# Altium PCB DAU_Kupplung_1_phasig_V1_16.PcbDoc
Units mm, origin at the board's own origin, x right, y up, seen from the top; angles counter-clockwise.
Board outline 142.88 x 57.48 mm, 2 copper layers (Top, Bottom), stack 1.57 mm thick; 57 components, 37 nets, 239 pads, 12 vias.
Unrouted connection lines stored in the file: 1.
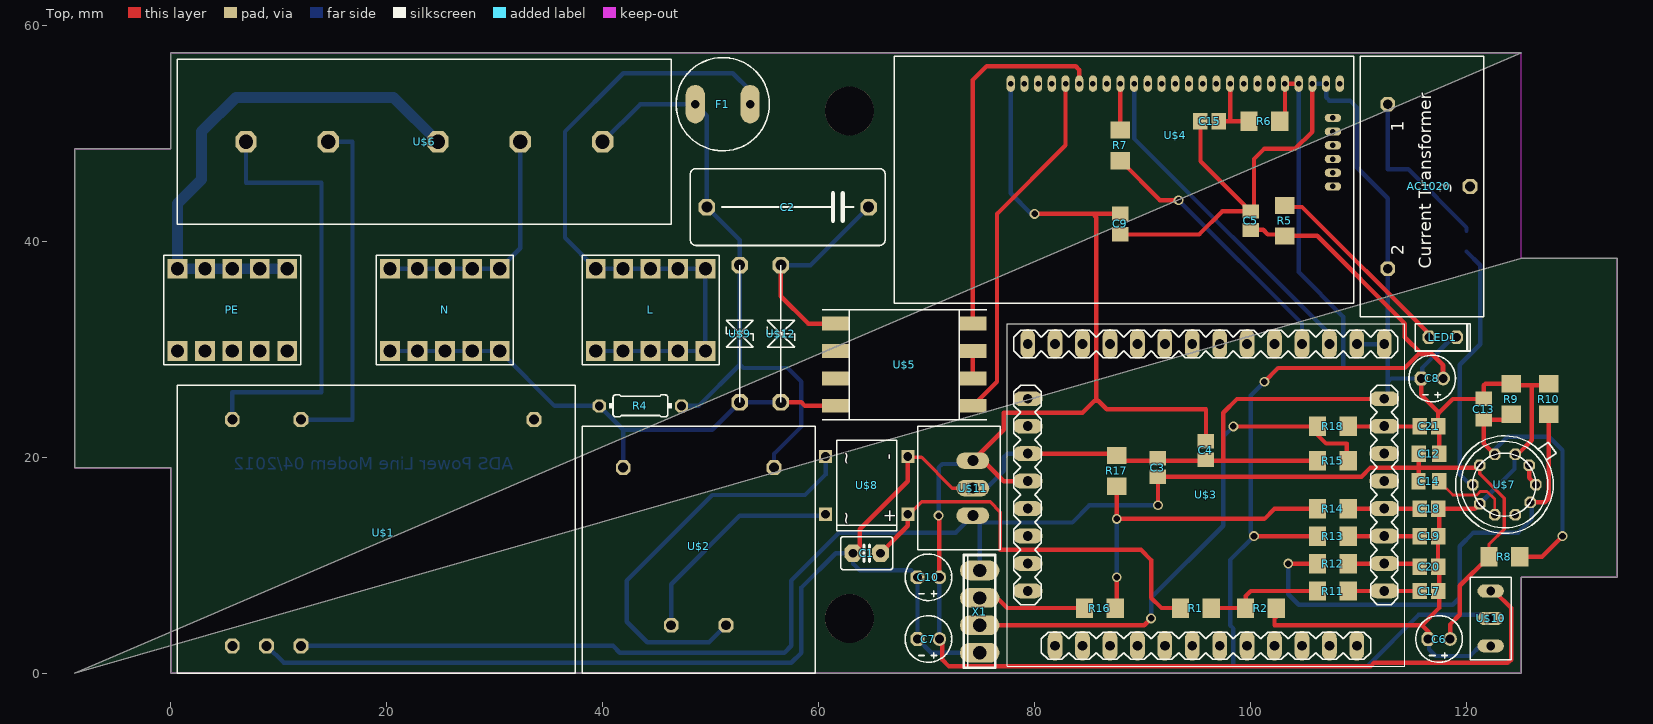
[diagram p0: Top view]
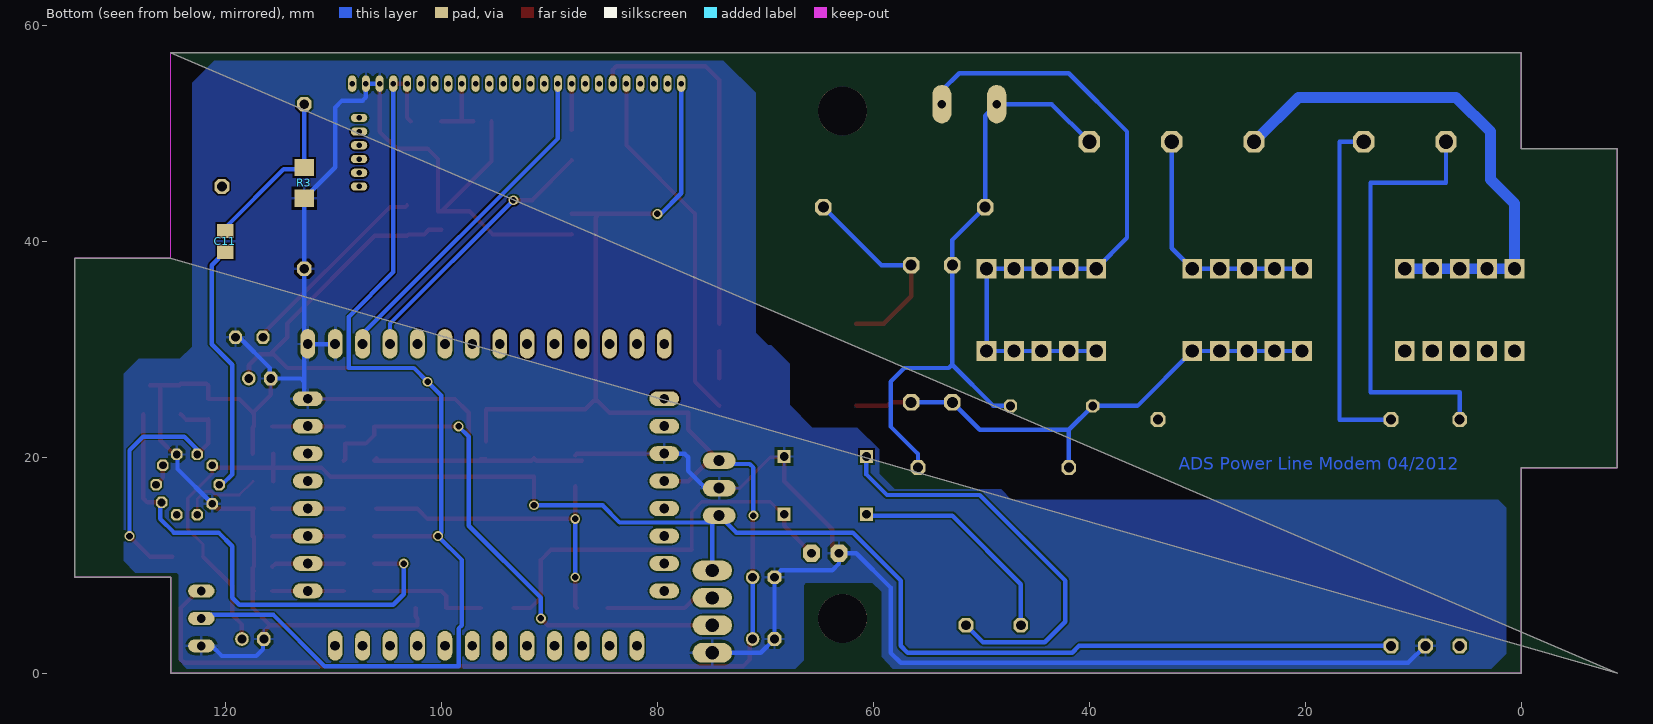
[diagram p1: Bottom view, seen from below]

## Layer stack, top to bottom
Top Solder: solder mask 0.0102, Solder Resist, Dk 3.5
Top: signal copper 0.035
Dielectric 1: core 1.5, FR-4, Dk 4.8
Bottom: signal copper 0.035
Bottom Solder: solder mask 0.0102, Solder Resist, Dk 3.5

## Board outline
125.095,57.48 0,57.48 0,48.59 -8.89,48.59 -8.89,19.05 0,19.05 0,0 125.095,0 125.095,8.89 133.985,8.89 133.985,38.43 125.095,38.43 -8.89,0

## Design rules (kind name [scope] priority, off if disabled: settings)
Clearance mdViaVia [IsVia vs IsVia] p1: gap=0.15
Clearance mdPadVia [IsPad vs IsVia] p2: gap=0.15
Clearance mdPadPad [IsPad vs IsPad] p3: gap=0.15
Clearance mdWireVia [(InLayerClass('Signal Layers') AND IsTrack) vs IsVia] p4: gap=0.15
Clearance mdWirePad [(InLayerClass('Signal Layers') AND IsTrack) vs IsPad] p5: gap=0.15
Clearance mdWireWire [(InLayerClass('Signal Layers') AND IsTrack) vs (InLayerClass('Signal Layers') AND IsTrack)] p6: gap=0.15
Clearance [All] p7: gap=0.15
HoleSize [All] p1: absolutevalues=TRUE maxlimit=2540 minlimit=0.3 maxpercent=80.000 minpercent=20.000
HoleToHoleClearance [All] p1: gap=0.2 allowstackedmicrovias=TRUE
PolygonConnect ThermalVias [IsVia] p1: connectstyle=Direct reliefconductorwidth=0.254 reliefentries=4 polygonreliefangle="90 Angle" airgapwidth=0.254
PolygonConnect [All] p2: connectstyle=Relief reliefconductorwidth=0.254 reliefentries=4 polygonreliefangle="90 Angle" airgapwidth=0.254
RoutingVias [All] p1: holewidth=0.711 width=1.27 viastyle="Through Hole" minholewidth=0.711 minwidth=1.27 maxholewidth=0.711 maxwidth=1.27
SilkToSilkClearance [All] p1 off: silktosilkclearance=0.254
SilkToSolderMaskClearance [IsPad] p1 off: minsilkscreentomaskgap=0.254 clearancetoexposedcopper=TRUE
SolderMaskExpansion [All] p1: expansion=0.075
UnpouredPolygon [All] p1: allowunpoured=FALSE
Width [All] p1: maxlimit=2540 minlimit=0.15 preferedwidth=0.254
25 further rules are at their usual default settings.

## Components (designator, comment, footprint, x,y, rotation, side; value= is the part's Value field where it differs from the comment)
AC1020 "" AC1010 121.615,32.385 r90 top
C1 "1µ" C2.5-3 64.465,11.125 r0 top
C2 "470n/250V" C150-072X183 57.15,43.18 r180 top
C3 "100n" C0805#1 91.44,19.05 r90 top
C4 "100n" C0805#1 95.885,20.65 r270 top
C5 "100n" C0805#1 100.025,41.91 r90 top
C6 "4µ7" E2-4 117.475,3.175 r180 top
C7 "4µ7" E2-4 70.18,3.175 r180 top
C8 "4µ7" E2-4 116.84,27.305 r180 top
C9 "100n" C0805#2 87.96,41.605 r90 top
C10 "4µ7" E2-4 70.18,8.89 r180 top
C11 "1µ" C0805#2 120.015,40.005 r270 bottom
C12 "0,1µ" C0805#2 116.535,20.32 r0 top
C13 "0,1µ" C0805#2 121.615,24.46 r90 top
C14 "4µ7" C0805#2 116.535,17.78 r180 top
C15 "1µ" C0805#1 96.215,51.13 r0 top
C17 "0,1µ" C0805#1 116.535,7.62 r0 top
C18 "0,1µ" C0805#1 116.535,15.24 r0 top
C19 "0,1µ" C0805#1 116.535,12.7 r0 top
C20 "0,1µ" C0805#1 116.535,9.855 r0 top
C21 "0,1µ" C0805#1 116.535,22.86 r0 top
F1 "T250V/250mA" TR5 51.13,52.705 r180 top
L "" FASTON_DOUBLE 44.45,33.655 r0 top
LED1 "" LED2X5 117.805,31.115 r0 top
N "" FASTON_DOUBLE 25.4,33.655 r0 top
PE "" FASTON_DOUBLE 5.715,33.655 r0 top
R1 "82k" R1206 94.945,6.045 r180 top
R2 "33k" R1206 100.965,6.045 r180 top
R3 "220R" R1206 112.725,45.415 r270 bottom
R4 "470k" 0204/7 43.51,24.765 r0 top
R5 "330R" R1206 103.2,41.91 r90 top
R6 "1M" R1206 101.295,51.13 r180 top
R7 "330R" R1206 87.96,48.895 r90 top
R8 "22k" R1206 123.52,10.795 r180 top
R9 "10k" R1206 124.155,25.4 r270 top
R10 "4k7" R1206 127.635,25.4 r90 top
R11 "10R" R1206 107.645,7.62 r0 top
R12 "10R" R1206 107.645,10.16 r0 top
R13 "10R" R1206 107.645,12.7 r0 top
R14 "10R" R1206 107.645,15.24 r0 top
R15 "220R" R1206 107.645,19.685 r0 top
R16 "680k" R1206 86.055,6.045 r180 top
R17 "470k" R1206 87.63,18.745 r270 top
R18 "10R" R1206 107.645,22.86 r0 top
U$1 "" RAC04_12SA 37.465,26.67 r180 top
U$2 "" TRAFO_0,35VA 38.1,22.86 r270 top
U$3 "" ADUC_MINIMUM 95.885,16.84 r90 top
U$4 "" IT800 109.55,57.15 r180 top
U$5 "" PLC-UEBERTRAGER_V2 67.945,28.575 r0 top
U$6 "" NETZFILTER 46.355,56.845 r180 top
U$7 "" TO100_10PIN 123.52,17.475 r90 top
U$8 "" RECTIFIER 60.655,21.59 r270 top
U$9 "" TSV 52.705,32.715 r270 top
U$10 "" TS1084_HOCH 122.25,2.54 r90 top
U$11 "" RECOM785X 76.835,17.145 r90 top
U$12 "" TSV 56.515,32.715 r270 top
X1 "" 4POL254 74.93,5.715 r90 top

## Footprints (in the part's own frame and the unit in brackets; to place one, negate y for a bottom-side part, rotate by r counter-clockwise, add the part's x,y. Pads: shape width x height; smd on the part's side, far side on the other; paste and mask are expansions set on the pad)
4POL254 [mil] "4POL254"
  oval 72x144 hole 48: 1(-150,0) 2(-50,0) 3(50,0) 4(150,0)
  silkscreen extent -205,-57 206,58
0204/7 [mil] "0204/7"
  oct 48x48 hole 32: 1(-150,0) 2(150,0)
  silkscreen extent -115,-40 115,40
AC1010 [mil] "AC1010"
  oct 54x54 hole 36: P$1(800,350) P$2(200,350) P$3(500,50)
  silkscreen extent 25,0 975,450
ADUC_MINIMUM [mil] "ADUC_MINIMUM"
  oval 54x108 hole 36: ADC0(-362.5,-650) ADC1(-262.5,-650) ADC2(-162.5,-650) ADC3(-62.5,-650) ADC4(238,-650) ADC5(338,-650) DAC0(38,-650) DAC1(138,-650) GND(138,650) GND2(-162.5,650) GND3(-262.5,650) P22(338,650) P23(238,650) P24(-362.5,650) VCC(38,650) VCC1(-62.5,650)
  oval 108x54 hole 36: ADC6(538,-650) ADC7(538,-550) ALE(-562.5,250) INT0(538,-250) MISO(538,-150) MOSI(538,450) P00(-562.5,150) P01(-562.5,50) P02(-562.5,-50) P03(-562.5,-150) P04(-562.5,-250) P05(-562.5,-350) P06(-562.5,-450) P07(-562.5,-550) P20(538,550) P21(538,650) P25(-562.5,550) P34(538,-50) P35(538,50) P36(538,150) P37(538,250) PWM0(-562.5,450) PWM1(-562.5,350) RXD(538,-450) SCLOCK(538,350) TXD(538,-350)
  silkscreen extent -638,-725 612,725
C2.5-3 [mil] "C2.5-3"
  oct 63x63 hole 32: 1(-50,0) 2(50,0)
  silkscreen extent -95,-60 95,60
C150-072X183 [mil] "C150-072X183"
  oct 60x60 hole 40: 1(-295,0) 2(295,0)
  silkscreen extent -355,-140 355,140
C0805#1 [mil] "C0805"
  rect 52x60 smd: 1(-33.46,0) 2(34,0)
C0805#2 [mil] "C0805"
  rect 52x60 smd: 1(-37.4,0) 2(38,0)
E2-4 [mil] "E2-4"
  round 50 hole 32: +(-40,0)
  oct 50x50 hole 32: -(40,0)
  silkscreen extent -85,-85 85,85
FASTON_DOUBLE [mil] "FASTON_DOUBLE"
  rect 72x72 hole 48: P$1(-200,-150) P$2(-100,-150) P$3(-200,150) P$4(-100,150) P$5(0,150) P$6(100,150) P$7(200,150) P$8(0,-150) P$9(100,-150) P$10(200,-150)
  silkscreen extent -250,-200 250,200
IT800 [mil] "IT800"
  oval 30x60 hole 20: 2AGND(100,100) 3GND(150,100) 4_33VAN(200,100) 5_33V(250,100) 5V(1250,100) LINE1(1000,100) LINE2(1050,100) P$1(50,100) P$6(300,100) P$7(350,100) P$8(400,100) P$10(500,100) P$11(550,100) P$12(600,100) P$13(650,100) P$14(700,100) P$15(750,100) P$16(800,100) P$17(850,100) P$18(900,100) P$19(950,100) P$22(1100,100) P$23(1150,100) P$24(1200,100) RESET(450,100)
  oval 60x30 hole 20: P$26(75,225) P$27(75,275) P$28(75,325) P$29(75,375) P$30(75,425) P$31(75,475)
  silkscreen extent 0,0 1675,900
LED2X5 [mil] "LED2X5"
  oct 48x48 hole 32: A(-50,0) K(50,0)
  silkscreen extent -100,-50 100,50
NETZFILTER [mil] "NETZFILTER"
  oct 78x78 hole 52: L(250,300) L'(1550,300) N(550,300) N'(1250,300) PE(850,300)
  silkscreen extent 0,0 1800,600
PLC-UEBERTRAGER_V2 [mm] "PLC-UEBERTRAGER_V2"
  rect 2.54x1.27 smd: 1LINE1(6.35,3.81) 2(6.35,1.27) 3(6.35,-1.27) 4LINE2(6.35,-3.81) 6NC(-6.35,1.27) 7NC(-6.35,-1.27) 8N(-6.35,-3.81) L5(-6.35,3.81)
  silkscreen extent -7.62,-5.08 7.62,5.08
R1206 [mil] "R1206"
  rect 63x71 smd: 1(-55.98,0) 2(56,0)
RAC04_12SA [mil] "RAC04_12SA"
  oct 54x54 hole 36: +VO(1000,950) GND(1125,950) L(1250,125) N(1000,125) NC(150,125) NC1(1250,950)
  silkscreen extent 0,0 1450,1050
RECOM785X [mil] "RECOM785X"
  oval 60x120 hole 40: GND(0,100) VIN(-100,100) VOUT(100,100)
  silkscreen extent -225,0 225,300
RECTIFIER [mil] "RECTIFIER"
  rect 48x48 hole 32: +(270,300) -(60,300) ~1(60,0) ~2(270,0)
  silkscreen extent 0,40 330,260
TO100_10PIN [mil] "TO100_10PIN"
  oct 42x42 hole 28: 1(110,-40) 2(110,35) 3(70,90) 4(0,115) 5(-70,90) 6(-110,35) 7(-110,-40) 8(-65,-95) 9(0,-115) 10(70,-90)
  silkscreen extent -178,-190 178,178
TR5 [mil] "TR5"
  oval 70x140 hole 32: 1(-100,0) 2(100,0)
  silkscreen extent -170,-170 170,170
TRAFO_0,35VA [mil] "TRAFO_0,35VA"
  oct 54x54 hole 36: L(150,700) N(150,150) OUT1(725,525) OUT2(725,325)
  silkscreen extent 0,0 900,850
TS1084_HOCH [mil] "TS1084_HOCH"
  oval 48x96 hole 32: GND(0,0) IN(200,0) OUT(100,0)
  silkscreen extent -50,-75 250,75
TSV [mil] "TSV"
  oct 60x60 hole 40: P$1(-200,0) P$2(300,0)
  silkscreen extent -200,-50 300,50

## Part data
AC1020: library part AC1010
C1: library part C2.5-3
C2: library part C150-072X183
C3 C4 C5 C9 C11 C12 C13 C14 C15 C17 C18 C19 C20 C21: library part C0805
C6 C7 C8 C10: library part E2-4
F1: library part TR5
L N PE: library part FASTON_DOUBLE
LED1: library part LED2X5
R1 R2 R3 R5 R6 R7 R8 R9 R10 R11 R12 R13 R14 R15 R16 R17 R18: library part R1206
R4: library part 0204/7
U$1: library part RAC04_12SA
U$2: library part TRAFO_0,35VA
U$3: library part ADUC_MINIMUM
U$4: library part IT800
U$5: library part PLC-UEBERTRAGER_V2
U$6: library part NETZFILTER
U$7: library part TO100_10PIN
U$8: library part RECTIFIER
U$9 U$12: library part TSV
U$10: library part TS1084_HOCH
U$11: library part RECOM785X
X1: library part 4POL254

## Free pads (board coordinates)
  round 4.521 hole 4.521: 1(62.865,5.08) 1(62.865,52.07)

## Via types
v1: diameter 0.91/0.91 (per signal layer), hole 0.61, Top to Bottom, 12 vias

## Nets (pads, with @x,y where several pads share a name; then routed paths per layer and width w, separated by ;. In a path a pad name is that pad's centre, name@x,y a point inside that pad or via, vN(x,y) a via of type N, cw(c..) or ccw(c..) an arc to the next point about the centre after c; other vN are vias at no path point)
+3V3: C5.1 C8.+ R5.1 R6.1 R13.1 U$4.4_33VAN U$4.5_33V U$10.OUT | length 144.3
  Top w0.406: C5.1@100.025,41.072 101.194,41.072 101.6,40.64 103.048,40.64 103.2,40.513 106.197,40.513 114.3,32.385 114.3,31.115 115.9,29.54 ; v1(100.33,12.7) R13.1 104.47,12.7 ; v1(101.295,27) 102.565,28.27 114.3,28.27 115.57,29.54 115.9,29.54 ; R6.1@102.87,51.13 103.2,51.435 U$4.5_33V U$4.4_33VAN ; 115.9,29.54 116.84,29.54 117.805,28.575 ; 117.805,28.575 117.856,28.524 C8.+ 117.805,27.381 117.805,28.575
  Bottom w0.406: U$4.4_33VAN 104.47,37.16 108.585,33.02 108.585,28.27 102.565,28.27 v1(101.295,27) 100.025,25.73 100.025,13.03 v1(100.33,12.7) 98.12,10.49 98.12,4.445 98.425,4.14 98.425,0.635 110.82,0.635 115.57,5.41 121.92,5.41 U$10.OUT
+5V: C4.1 C7.+ C9.2 C10.+ U$3.VCC U$4.5V U$10.IN U$11.VOUT | length 157.1
  Top w0.305: v1(71.12,14.605) v1@71.196,14.554
  Top w0.406: C7.+ 71.45,2.921 71.45,1.27 72.085,0.635 111.125,0.635 111.455,0.965 123.825,0.965 124.155,1.27 124.155,6.045 122.555,7.62 U$10.IN ; C10.+ v1@71.196,14.554 ; U$3.VCC@79.375,17.78 77.165,17.78 75.26,19.685 U$11.VOUT 77.165,22.555 77.165,24.13 84.455,24.13 85.573,25.248 85.903,25.248 ; v1(80.01,42.545) 80.035,42.545 87.96,42.545 85.42,42.545 85.725,42.24 85.725,25.4 85.903,25.248 ; C4.1@95.885,21.488 95.885,24.46 86.69,24.46 85.903,25.248
  Bottom w0.406: v1(71.12,14.605) 71.12,19.05 71.45,19.38 73.99,19.38 U$11.VOUT ; C7.+ C10.+ ; U$4.5V 77.8,44.45 79.705,42.545 v1(80.01,42.545)
+12V: C3.1 C6.+ C12.1 C14.2 R8.2 U$1.+VO U$7.3 U$11.VIN X1.4 | length 148.3
  Top w0.305: U$7.3 121.234,18.491 123.52,16.205 123.52,13.335 122.098,11.938 R8.2
  Top w0.406: v1(91.44,15.57) 91.44,18.212 110.287,18.212 111.125,19.05 115.595,19.05 ; C14.2@115.595,17.78 115.595,19.05 ; C12.1@115.595,20.32 115.595,19.05 ; C6.+ 118.491,4.521 119.38,5.41 119.38,8.103 R8.2 ; U$7.3 121.031,19.05 115.595,19.05
  Bottom w0.406: U$1.+VO 40.97,2.54 41.605,1.905 56.845,1.905 57.48,2.54 57.48,8.585 61.925,13.03 72.72,13.03 U$11.VIN U$11.VIN@74.93,13.97 ; X1.4 U$11.VIN@74.93,13.97 ; v1(91.44,15.57) 85.09,15.57 83.515,13.97 U$11.VIN@74.93,13.97
ADC0: R1.1 R2.2 R11.1 | length 11.2
  Top w0.406: R1.1 99.568,6.045 99.568,7.163 100.025,7.62 R11.1
ADC1: R10.1 R12.1 U$7.8 | length 45.8
  Top w0.406: v1(103.505,10.16) R12.1 ; U$7.8 127.254,15.824 127.635,16.205 R10.1@127.635,24.003
  Bottom w0.406: v1(103.505,10.16) 103.505,7.315 104.47,6.35 118.745,6.35 119.38,6.985 119.38,11.76 120.65,13.03 124.79,13.03 126.06,14.3 U$7.8@126.06,15.875
GND: AC1020.P$2 C1.1 C3.2 C4.2 C5.2 C6.- C7.- C8.- C9.1 C10.- C12.2 C13.2 C15.1 C17.2 C18.2 C19.2 C20.2 C21.2 LED1.K R2.1 R3.2 R9.1 R10.2 R15.1 R17.1 U$1.GND U$3.ADC5 U$3.ADC6 U$3.ADC7 U$3.GND U$4.2AGND U$4.3GND U$7.1 U$7.5 U$8.- U$10.GND U$11.GND X1.1 | length 314
  Top w0.305: U$8.-@68.275,20.015 69.545,20.015 72.39,17.145 U$11.GND
  Top w0.406: C1.1 63.83,11.76 63.83,13.335 68.275,17.78 U$8.-@68.275,20.015 ; U$3.GND@79.375,20.32 87.478,20.32 R17.1 ; R17.1@86.995,19.685 91.237,19.685 C3.2 91.669,19.685 C4.2@96.52,19.685 ; C9.1@87.96,40.665 87.96,40.64 95.25,40.64 97.384,42.774 C5.2 ; C15.1@95.377,51.13 95.377,47.422 C5.2 ; C4.2@95.885,19.812 96.418,19.812 C4.2@96.52,19.685 ; R2.1 102.387,5.232 102.235,5.08 102.235,4.445 115.9,4.445 ; U$4.3GND 105.74,50.165 104.14,48.59 101.295,48.59 100.33,47.625 100.33,42.774 C5.2 ; R15.1@106.02,19.914 R15.1 97.485,19.685 ; U$3.ADC5@112.395,25.4 98.755,25.4 97.485,24.13 97.485,19.685 ; C8.- 115.824,25.781 117.475,24.13 ; C6.- 116.535,3.251 116.535,3.81 115.9,4.445 ; C17.2@117.373,7.62 C17.2@117.475,7.518 ; C12.2@117.475,20.32 117.475,22.784 117.373,22.86 117.373,24.028 117.475,24.13 ; U$7.5 120.777,15.24 117.373,15.24 117.475,15.138 117.475,12.7 117.373,12.7 117.373,9.855 117.475,9.754 C17.2@117.475,7.518 ; U$7.1 124.587,20.32 124.79,20.32 126.06,21.59 126.06,26.67 ; R10.2@127,26.67 126.06,26.67 ; C4.2@96.52,19.685 97.485,19.685 ; 115.9,4.445 117.475,6.045 C17.2@117.475,7.518 ; 117.475,24.13 118.745,25.4 121.615,25.4 121.615,26.67 121.768,26.822 R9.1 124.308,26.67 126.06,26.67
  Bottom w0.406: U$1.GND 10.49,0.965 57.48,0.965 58.42,1.905 58.42,7.95 61.595,11.125 C1.1 ; C1.1@63.5,11.125 C1.1 ; U$11.GND 75.565,17.145 77.165,18.745 77.165,20.015 77.47,20.32 U$3.GND@79.375,20.32 ; X1.1 70.434,1.905 C7.- C10.- 69.215,8.89 68.58,9.525 63.83,9.525 63.195,10.16 C1.1 ; U$4.3GND U$4.2AGND 107.01,53.34 107.315,53.035 109.22,53.035 109.855,52.4 109.855,46.863 R3.2 AC1020.P$2 U$3.ADC6@112.725,30.81 ; U$3.ADC7@109.855,30.48 112.395,30.48 U$3.ADC6@112.725,30.81 ; U$3.ADC5@112.395,25.4 112.725,25.73 112.725,27 ; C6.- 116.535,3.124 116.535,2.235 117.17,1.6 120.345,1.6 121.285,2.54 U$10.GND ; LED1.K 118.745,31.115 115.9,28.27 115.9,27.381 C8.- 113.03,27.305 112.725,27 ; U$7.5 124.46,18.923 124.46,20.32 U$7.1 ; 112.725,27 U$3.ADC6@112.725,30.81
N$1: U$5.2 U$5.3 | length 2.5
  Top w0.406: U$5.3 U$5.2
N$2: U$7.9 U$7.10 | length 2
  Top w0.406: U$7.10 125.806,18.11 U$7.9
N$3: R7.2 U$4.P$17 | length 4.3
  Top w0.406: R7.2 U$4.P$17
N$4: U$2.OUT1 U$8.~1 | length 38.6
  Bottom w0.406: U$2.OUT1 49.86,2.87 44.145,2.87 42.24,4.775 42.24,8.585 50.165,16.51 58.75,16.51 60.655,18.415 U$8.~1
N$5: U$4.LINE1 U$5.1LINE1 | length 34.3
  Top w0.406: U$5.1LINE1 74.295,54.94 75.565,56.21 83.82,56.21 84.15,55.88 U$4.LINE1
N$6: F1.1 L.P$1 L.P$2 L.P$3 L.P$4 L.P$5 L.P$6 L.P$7 L.P$8 L.P$9 L.P$10 | length 63.1
  Bottom w0.406: L.P$1 L.P$2 L.P$8 L.P$9 L.P$10 L.P$7 L.P$6 L.P$5 L.P$4 L.P$3 36.525,40.335 36.525,50.165 41.91,55.575 52.07,55.575 53.67,53.975 F1.1
N$7: C1.2 R1.2 U$8.+ | length 38.4
  Top w0.305: U$8.+@68.275,14.605 69.545,15.875 75.895,15.875 76.835,14.935 76.835,11.43
  Top w0.406: C1.2 68.275,13.665 68.275,14.605 U$8.+ ; 76.835,11.43 89.865,11.43 90.805,10.49 90.805,6.985 91.77,6.045 R1.2@93.345,6.045
N$8: AC1020.P$1 C11.1 R3.1 | length 15.9
  Bottom w0.406: R3.1@112.725,46.685 R3.1 ; AC1020.P$1 R3.1 ; C11.1@120.015,40.97 120.015,41.275 114.63,46.685 112.878,46.685 R3.1
N$9: U$2.OUT2 U$8.~2 | length 20.8
  Bottom w0.406: U$2.OUT2 46.355,8.255 52.705,14.605 60.528,14.605 U$8.~2
N$10: C11.2 U$7.4 | length 23.6
  Bottom w0.406: C11.2@120.015,39.065 121.285,37.795 121.285,30.48 119.38,28.575 119.38,18.415 120.345,17.475 U$7.4
N$11: C2.1 U$5.L5 U$12.P$1 | length 19.4
  Top w0.406: U$12.P$1 56.515,34.925 59.055,32.385 U$5.L5
  Bottom w0.406: U$12.P$1 59.258,37.795 C2.1
N$13: U$4.LINE2 U$5.4LINE2 | length 33.4
  Top w0.406: U$5.4LINE2 76.53,27 76.53,42.545 82.88,48.895 U$4.LINE2
N$14: R7.1 U$3.TXD | length 25
  Top w0.406: R7.1@87.96,47.498 91.618,43.815 v1(93.345,43.815)
  Bottom w0.406: v1(93.345,43.815) 104.775,32.385 U$3.TXD@104.775,30.48
N$15: U$3.RXD U$4.P$16 | length 31.6
  Bottom w0.406: U$4.P$16 89.23,49.53 107.315,31.445 U$3.RXD@107.315,30.48
N$16: C14.1 U$7.6 | length 7.6
  Top w0.254: C14.1@117.475,17.78 118.745,16.51 120.98,16.51 121.285,16.84 121.92,16.84 122.631,16.129 U$7.6
N$17: C21.1 R18.2 U$3.ADC4 | length 6.6
  Top w0.406: R18.2 112.395,22.86 C21.1@115.697,22.86
N$18: U$1.L U$6.L' | length 41
  Bottom w0.406: U$1.L 5.715,26.035 13.97,26.035 13.97,45.415 6.985,45.415 U$6.L'
N$19: LED1.A R5.2 | length 18.6
  Top w0.406: R5.2 103.353,43.18 104.775,43.18 116.535,31.445 LED1.A
N$20: C15.2 R6.2 U$4.RESET | length 6.5
  Top w0.406: C15.2@97.053,51.13 98.12,51.13 ; U$4.RESET 98.12,51.13 ; R6.2@100.025,51.13 98.12,51.13
N$21: C13.1 R8.1 R9.2 U$7.2 | length 27.3
  Top w0.406: C13.1@121.615,23.52 C13.1@121.615,23.495 ; U$7.2 121.615,21.285 C13.1@121.615,23.495 ; R9.2@124.155,24.003 123.673,23.495 C13.1@121.615,23.495 ; R8.1 127,10.795 v1(128.905,12.7)
  Bottom w0.406: U$7.2@122.555,20.015 U$7.2@122.555,20.193 ; U$7.2 U$7.2@122.555,20.193 ; v1(128.905,12.7) 128.905,20.65 127.635,21.92 123.825,21.92 122.555,20.65 U$7.2@122.555,20.193
N$22: U$1.N U$6.N' | length 32.7
  Bottom w0.406: U$1.N 16.84,23.495 16.84,49.225 U$6.N'
N$23: N.P$1 N.P$2 N.P$3 N.P$4 N.P$5 N.P$6 N.P$7 N.P$8 N.P$9 N.P$10 R4.1 U$2.N U$5.8N U$6.N U$9.P$2 U$12.P$2 | length 71.7
  Top w0.406: U$12.P$2 58.42,25.095 58.75,24.765 U$5.8N
  Bottom w0.406: N.P$1 N.P$2 N.P$8 N.P$9 N.P$10 35.56,24.765 R4.1 41.91,22.555 ; N.P$3 N.P$4 N.P$5 N.P$6 N.P$7 32.385,39.37 U$6.N ; U$2.N 41.91,22.555 ; U$12.P$2 U$9.P$2 50.165,22.555 41.91,22.555
N$24: C2.2 F1.2 R4.2 U$2.L U$6.L U$9.P$1 | length 58.3
  Bottom w0.406: U$6.L 43.51,52.705 F1.2 49.657,51.638 C2.2 52.705,40.132 U$9.P$1 52.705,28.575 ; R4.2@47.32,24.46 47.625,24.765 48.895,24.765 52.705,28.575 ; U$2.L 55.88,20.32 58.42,22.86 58.42,27 57.15,28.27 53.035,28.27 52.705,28.575
N$27: C18.1 R14.2 U$3.ADC3 | length 6.6
  Top w0.406: R14.2 112.395,15.24 C18.1@115.697,15.24
N$28: C19.1 R13.2 U$3.ADC2 | length 6.6
  Top w0.406: R13.2 112.395,12.7 C19.1@115.697,12.7
N$29: C20.1 R12.2 U$3.ADC1 | length 6.7
  Top w0.406: R12.2 112.395,10.16 115.367,10.16 C20.1@115.697,9.855
N$30: C17.1 R11.2 U$3.ADC0 | length 6.6
  Top w0.406: R11.2 112.395,7.62 C17.1@115.697,7.62
N$31: R15.2 R18.1 X1.2 | length 50.3
  Top w0.406: X1.2 90.17,4.445 v1(90.805,5.08) ; v1(98.425,22.86) R18.1 106.223,22.073 107.01,21.285 108.915,21.285 108.915,19.837 R15.2
  Bottom w0.406: v1(90.805,5.08) 90.805,6.985 97.485,13.665 97.485,21.92 v1(98.425,22.86)
N$32: R16.2 X1.3 | length 10.1
  Top w0.406: X1.3 76.53,6.985 77.47,6.045 R16.2
N$33: R14.1 R16.1 R17.2 | length 30.1
  Top w0.406: R16.1 87.63,6.223 v1(87.63,8.89) ; R17.2 v1(87.63,14.3) 101.295,14.3 102.235,15.24 R14.1@106.045,15.24
  Bottom w0.406: v1(87.63,8.89) v1(87.63,14.3)
PE: PE.P$1 PE.P$2 PE.P$3 PE.P$4 PE.P$5 PE.P$6 PE.P$7 PE.P$8 PE.P$9 PE.P$10 U$6.PE | length 49.5
  Bottom w1.016: PE.P$7@11.125,37.465 PE.P$6 PE.P$5 PE.P$4 0.965,37.465 0.635,37.16 0.635,43.51 2.87,45.72 2.87,50.165 6.045,53.34 20.65,53.34 U$6.PE
pads on no net: AC1020.P$3 U$1.NC U$1.NC1 U$3.ALE U$3.DAC0 U$3.DAC1 U$3.GND2 U$3.GND3 U$3.INT0 U$3.MISO U$3.MOSI U$3.P00 U$3.P01 U$3.P02 U$3.P03 U$3.P04 U$3.P05 U$3.P06 U$3.P07 U$3.P20 U$3.P21 U$3.P22 U$3.P23 U$3.P24 U$3.P25 U$3.P34 U$3.P35 U$3.P36 U$3.P37 U$3.PWM0 U$3.PWM1 U$3.SCLOCK U$3.VCC1 U$4.P$1 U$4.P$6 U$4.P$7 U$4.P$8 U$4.P$10 U$4.P$11 U$4.P$12 U$4.P$13 U$4.P$14 U$4.P$15 U$4.P$18 U$4.P$19 U$4.P$22 U$4.P$23 U$4.P$24 U$4.P$26 U$4.P$27 U$4.P$28 U$4.P$29 U$4.P$30 U$4.P$31 U$5.6NC U$5.7NC U$7.7

## Polygon pours and split planes (outlines as drawn)
GND on Bottom "Bottom-GND" (solid, remove dead copper, pour order 2): 1.397,15.324 1.397,1.821 2.786,0.432 58.201,0.432 59.258,1.518 59.258,7.536 60.104,8.382 66.281,8.382 66.472,8.176 66.472,1.186 67.226,0.432 123.604,0.432 124.358,1.186 124.358,9.136 124.544,9.322 128.354,9.322 129.438,10.406 129.438,27.719 128.049,29.108 124.239,29.108 123.088,30.259 123.088,54.694 121.064,56.718 73.907,56.718 70.917,53.755 70.917,31.529 69.766,30.378 69.461,30.378 67.742,28.659 67.742,24.849 65.651,22.758 61.511,22.758 59.487,20.734 59.487,18.499 58.031,17.043 48.174,17.043 47.234,16.078 2.151,16.078

## Keep-outs
Keep-Out Layer:
  lines w0: -8.89,19.05 -8.89,48.59 0,48.59 0,57.48 125.095,57.48 125.095,38.43 133.985,38.43 133.985,8.89
  lines w0.15: -8.89,19.05 0,19.05 0,0 125.095,0 125.095,8.89 133.985,8.89

## Other copper
Bottom:
  text "ADS Power Line Modem 04/2012" at 31.75,18.415 h1.97

## Silkscreen, mask and mechanical layers (free items; w line width, h text height)
Dimension:
  lines w0: -8.89,19.05 -8.89,48.59 0,48.59 0,57.48 125.095,57.48 125.095,38.43 133.985,38.43 133.985,8.89
  lines w0.15: -8.89,19.05 0,19.05 0,0 125.095,0 125.095,8.89 133.985,8.89
Unrouted:
  lines w0: 0.635,37.16 0.635,29.845 3.175,29.845 5.715,29.845 8.255,29.845 10.795,29.845 ; 0.635,37.465 0.965,37.465 ; 10.795,37.465 11.125,37.465 ; 30.48,29.845 30.48,37.465 ; 47.32,24.765 47.625,24.765 ; 93.345,6.045 93.523,6.045 ; 99.873,51.13 100.025,51.13 ; 102.718,51.13 102.87,51.13 ; 106.045,15.24 106.223,15.24 ; 125.933,15.824 126.06,15.875 ; 127,26.67 127.635,26.822
GND-Poly:
  lines w0.05: 1.397,1.778 1.397,15.367 2.159,16.129 47.244,16.129 48.133,17.018 58.039,17.018 59.563,18.542 59.563,20.828 61.468,22.733 65.659,22.733 67.691,24.765 67.691,28.575 69.469,30.353 69.723,30.353 70.866,31.496 70.866,53.721 73.914,56.769 121.031,56.769 123.063,54.737 123.063,30.226 124.206,29.083 128.016,29.083 129.54,27.559 129.54,10.414 128.397,9.271 124.587,9.271 124.333,9.017 124.333,1.143 123.698,0.508 67.183,0.508 66.421,1.27 66.421,8.255 66.294,8.382 60.071,8.382 59.309,7.62 59.309,1.524 58.166,0.381 2.794,0.381 1.397,1.778

## Text inside footprints (layer, text, board x,y; h text height)
AC1020: Top Overlay "Current Transformer" at 117.17,37.465 h1.97 r90; Top Overlay "3" at 119.075,44.45 h1.97 r90; Top Overlay "2" at 114.63,38.735 h1.97 r90; Top Overlay "1" at 114.63,50.165 h1.97 r90
U$8: Top Overlay "-" at 65.735,20.32 h1.97 r270; Top Overlay "+" at 65.735,15.24 h1.97 r270; Top Overlay "~" at 61.671,14.986 h1.97 r270; Top Overlay "~" at 61.671,20.574 h1.97 r270